# Altium PCB SPI-主板-开关.PcbDoc (part 6 of 11)
Units mm, origin at the board's own origin, x right, y up, seen from the top; angles counter-clockwise.
Board outline 97.69 x 103.45 mm, 2 copper layers (Top Layer, Bottom Layer); 86 components, 63 nets, 260 pads, 250 vias.
Unrouted connection lines stored in the file: 6.
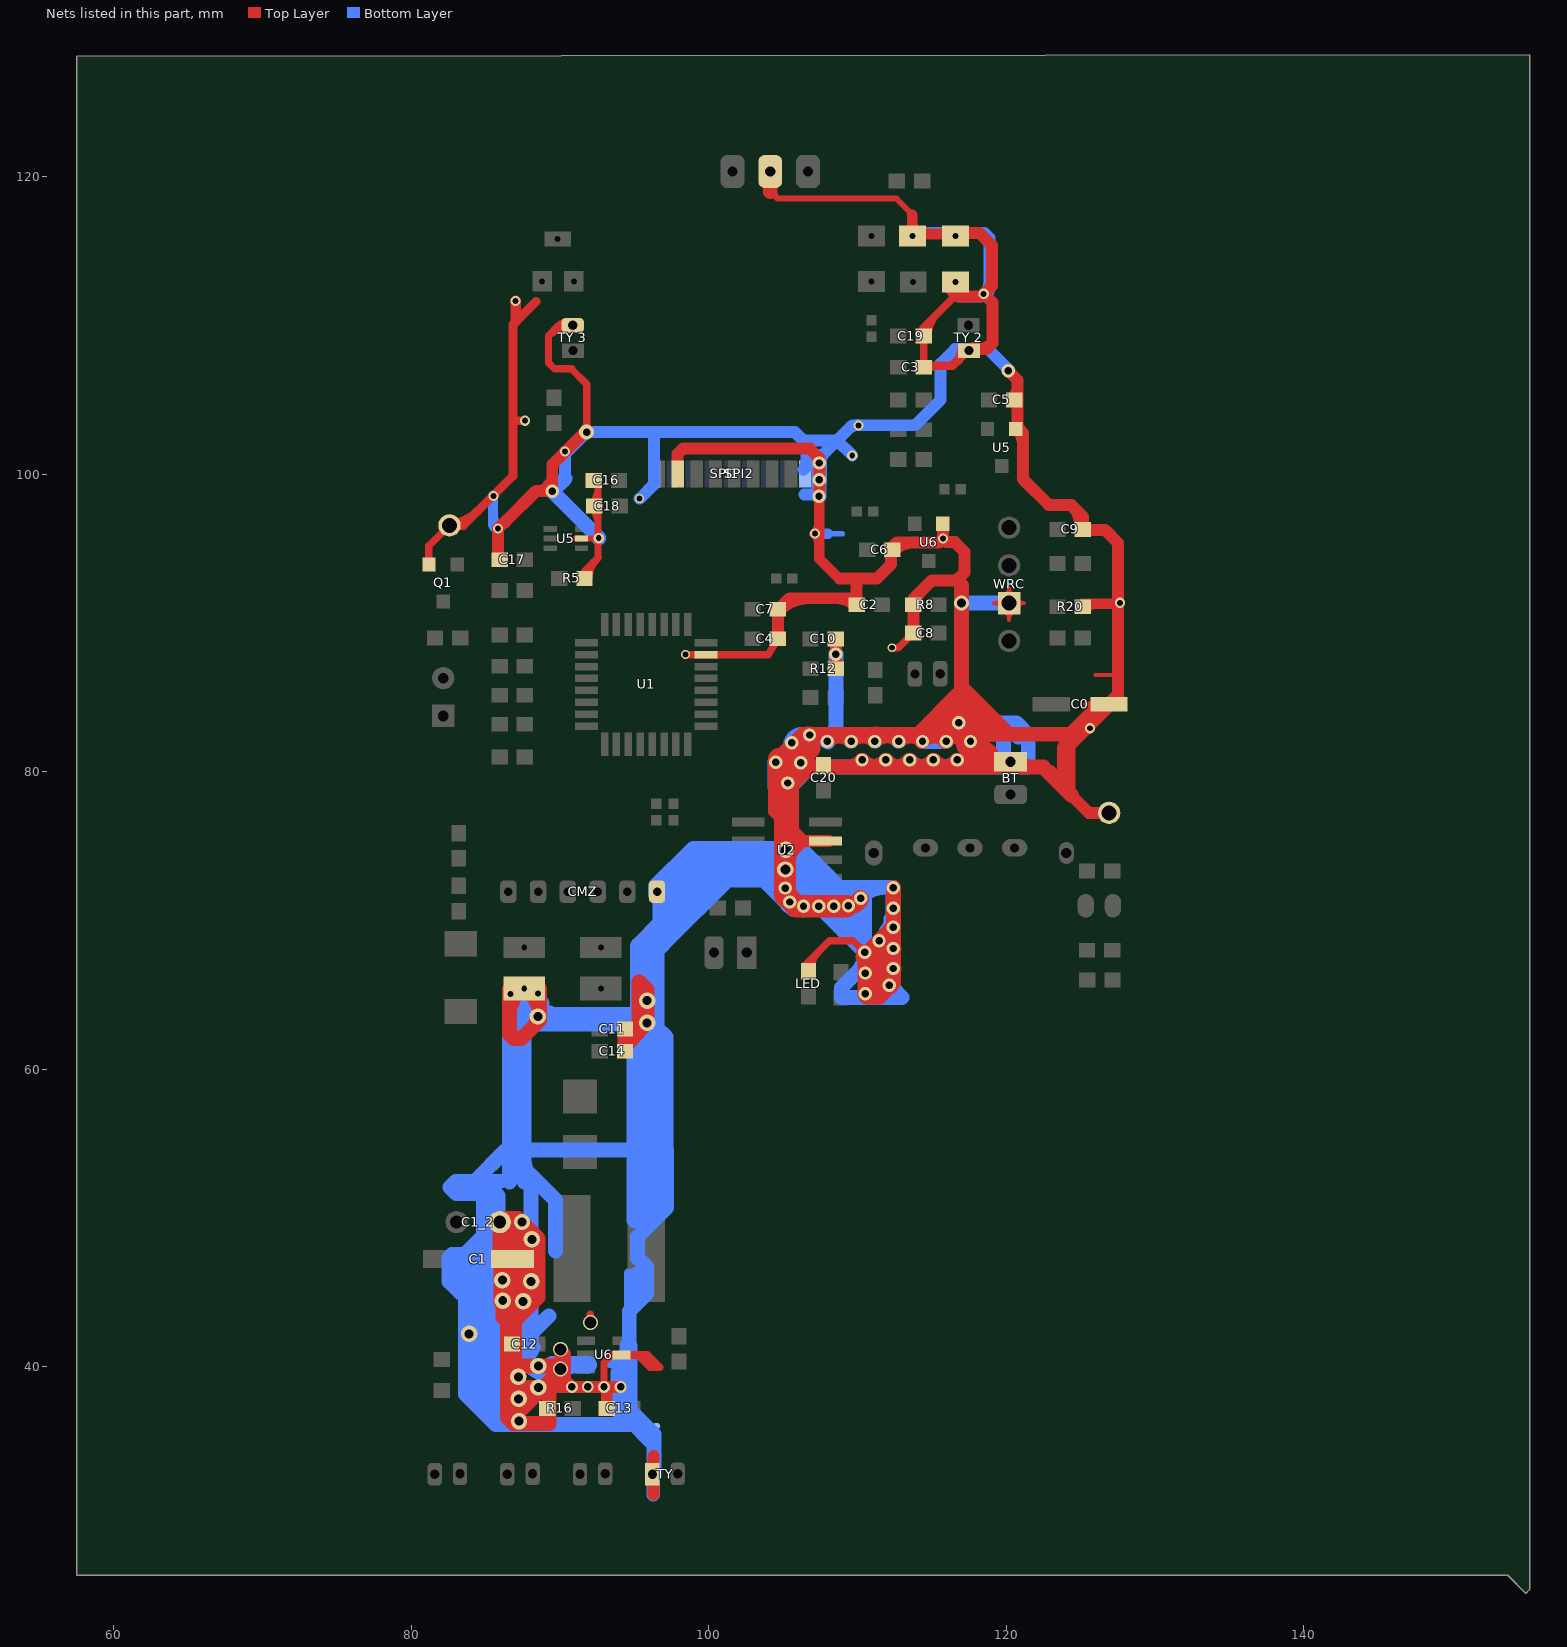
[diagram p6: the nets of this part, all layers, seen from the top]

## Via types
v1: diameter 0.9, hole 0.5, Top Layer to Bottom Layer, 104 vias
v2: diameter 0.68, hole 0.4, Top Layer to Bottom Layer, 100 vias
v3: diameter 1.1, hole 0.6, Top Layer to Bottom Layer, tented both sides, 16 vias
v4: diameter 1, hole 0.8, Top Layer to Bottom Layer, tented both sides, 8 vias
v5: diameter 1, hole 0.6, Top Layer to Bottom Layer, 4 vias
v6: diameter 0.8, hole 0.5, Top Layer to Bottom Layer, 4 vias
v7: diameter 0.7, hole 0.4, Top Layer to Bottom Layer, 4 vias
v8: diameter 0.6, hole 0.4, Top Layer to Bottom Layer, 3 vias
v9: diameter 1.1, hole 0.68, Top Layer to Bottom Layer, 2 vias
v10: diameter 0.8, hole 0.4, Top Layer to Bottom Layer, 2 vias
v11: diameter 1, hole 0.5, Top Layer to Bottom Layer, 1 vias
v12: diameter 0.9, hole 0.6, Top Layer to Bottom Layer, tented bottom, 1 vias
v13: diameter 1.2, hole 0.68, Top Layer to Bottom Layer, 1 vias

## Nets (pads, with @x,y where several pads share a name; then routed paths per layer and width w, separated by ;. In a path a pad name is that pad's centre, name@x,y a point inside that pad or via, vN(x,y) a via of type N, cw(c..) or ccw(c..) an arc to the next point about the centre after c; other vN are vias at no path point) (continued)
GND: (continued)
  Top Layer w0.6: pad.4@82.271,96.52 pad.4@83.16,96.52 ; pad.4@82.575,96.571 83.515,96.571 86.843,99.898 86.843,110.084 87.03,110.271 88.392,111.633 ; 86.893,103.607 v2(87.655,103.607) ; C3.1@114.45,107.3 116.382,107.3 117.501,108.419 ; 116.894,107.887 ccw(c116.562,108.22) 117.009,108.364 ; pad.4@82.194,96.589 ccw(c82.194,99.822) 84.48,97.536 ; pad.4@82.194,96.589 ccw(c82.194,99.822) 84.48,97.536 ; pad.4@82.194,96.589 ccw(c82.194,99.822) 84.48,97.536 ; C3.1@114.641,107.059 cw(c115.224,106.476) 115.224,107.3 ; C3.1@114.641,107.059 cw(c115.224,106.476) 115.224,107.3 ; C3.1@114.641,107.059 cw(c115.224,106.476) 115.224,107.3 ; 116.647,107.566 ccw(c115.794,108.419) 117.001,108.419 ; 116.647,107.566 ccw(c115.794,108.419) 117.001,108.419 ; 116.647,107.566 ccw(c115.794,108.419) 117.001,108.419 ; 116.792,107.639 cw(c117.785,107.373) 117.271,108.263 ; 116.792,107.639 cw(c117.785,107.373) 117.271,108.263 ; 116.792,107.639 cw(c117.785,107.373) 117.271,108.263
  Top Layer w0.7: 87.02,110.28 v2(87.02,111.658) ; v1@107.442,98.476 107.442,94.336 108.788,92.989 ; 108.839,92.939 109.169,92.939 ; pad.0@113.7,116.032 113.7,117.465 ; R20.1@125.15,91.308 v2@127.432,91.308 ; v2@107.144,96.005 ccw(c106.425,96.724) 107.442,96.724 ; v2@107.144,96.005 ccw(c106.425,96.724) 107.442,96.724 ; v2@107.144,96.005 ccw(c106.425,96.724) 107.442,96.724 ; v2@107.144,96.019 cw(c106.425,95.3) 107.442,95.3 ; v2@107.144,96.019 cw(c106.425,95.3) 107.442,95.3 ; v2@107.144,96.019 cw(c106.425,95.3) 107.442,95.3 ; pad.0@113.453,116.279 ccw(c112.855,116.877) 113.7,116.877 ; pad.0@113.453,116.279 ccw(c112.855,116.877) 113.7,116.877 ; pad.0@113.453,116.279 ccw(c112.855,116.877) 113.7,116.877 ; 113.7,116.877 ccw(c114.545,116.877) pad.0@113.947,116.279 ; 113.7,116.877 ccw(c114.545,116.877) pad.0@113.947,116.279 ; 113.7,116.877 ccw(c114.545,116.877) pad.0@113.947,116.279 ; R20.1@125.275,91.23 ccw(c125.495,91.608) 125.714,91.229 ; R20.1@125.275,91.23 ccw(c125.495,91.608) 125.714,91.229 ; R20.1@125.275,91.23 ccw(c125.495,91.608) 125.714,91.229 ; R20.1@125.306,90.994 cw(c126.063,90.237) 126.063,91.308 ; R20.1@125.306,90.994 cw(c126.063,90.237) 126.063,91.308 ; R20.1@125.306,90.994 cw(c126.063,90.237) 126.063,91.308
  Top Layer w0.8: C17.2@85.847,94.356 v2(85.847,96.363) 86.411,96.926 ; 86.411,96.901 88.392,98.882 88.63,98.882 89.484,98.882 89.484,99.736 89.484,100.533 ; pad.0@86.614,65.406 87.617,65.406 87.617,65.431 pad.0@87.617,65.457 ; 87.681,38.608 87.716,38.643 88.91,38.643 v6@90.475,38.643 ; 89.484,100.66 91.669,102.845 v11(91.796,102.845) ; v6@92.95,38.673 v6@92.95,38.643 ; C13.2@93.15,37.2 93.15,38.443 v6@92.95,38.643 ; v6(94.082,38.643) v6(92.964,38.643) v6@92.95,38.643 ; 96.284,31.4 96.284,34.006 ; SPI1.7@97.917,100.032 97.917,101.371 98.273,101.727 106.807,101.727 107.442,101.092 v1(107.442,100.762) v1(107.442,99.644) v1@107.442,98.476 ; C4.2@104.65,89.181 C7.1@104.65,90.932 ; C7.1@104.699,90.932 105.435,91.669 109.513,91.669 C2.1@109.95,91.232 109.95,92.957 109.982,92.989 ; 105.156,76.86 v9@105.156,73.575 ; v9@105.181,72.923 105.181,73.304 v9@105.156,73.33 ; 105.588,76.124 106.35,75.362 ; 106.07,75.362 U2.3@108.077,75.362 ; R12.1@108.55,86.932 v1(108.55,87.909) C10.1@108.55,88.932 ; 108.788,92.989 109.982,92.989 ; pad.0@113.65,115.802 pad.0@113.65,116.032 ; C8.1@113.767,89.813 113.767,91.618 115.011,92.862 116.662,92.862 ; U6.1@115.75,96.682 115.748,96.68 v2(115.748,95.682) ; pad.0@116.6,112.932 116.357,112.344 116.4,112.302 116.756,111.946 118.321,111.946 v2@118.504,112.128 ; pad.0@116.865,116.23 118.199,116.23 119.05,115.38 119.05,112.674 v2@118.504,112.128 ; 117,92.525 116.662,92.862 ; 117.501,108.419 118.681,108.419 119.075,108.814 ; v2(118.491,112.141) v2@118.504,112.128 ; v1(120.142,106.959) 120.766,106.335 120.766,103.134 121.133,102.767 121.133,99.67 122.86,97.942 124.384,97.942 ; 124.409,78.384 125.552,77.241 pad.4@126.924,77.241 ; C0.2@126.924,84.633 127.533,85.242 127.533,95.377 126.644,96.266 125.184,96.266 125.184,97.142 124.384,97.942 ; pad.0@86.629,65.11 cw(c87.343,64.397) pad.0@87.343,65.406 ; pad.0@86.629,65.11 cw(c87.343,64.397) pad.0@87.343,65.406 ; pad.0@86.629,65.11 cw(c87.343,64.397) pad.0@87.343,65.406 ; v6@90.475,38.643 v6(90.805,38.643) ; v6@90.475,38.643 90.043,39.075 v4(90.043,39.853) 90.348,39.853 90.348,40.869 v4(90.043,41.173) 90.043,40.107 90.348,39.802 90.348,39.1 v6(90.805,38.643) ; v6(90.805,38.643) v6@92.95,38.643 ; C7.1@104.771,90.861 cw(c106.72,88.912) 106.72,91.669 ; C7.1@104.771,90.861 cw(c106.72,88.912) 106.72,91.669 ; C7.1@104.771,90.861 cw(c106.72,88.912) 106.72,91.669 ; v9@105.05,73.537 ccw(c104.403,74.185) 105.318,74.185 ; v9@105.05,73.537 ccw(c104.403,74.185) 105.318,74.185 ; v9@105.05,73.537 ccw(c104.403,74.185) 105.318,74.185 ; v9@105.075,74.646 cw(c104.489,74.06) 105.318,74.06 ; v9@105.075,74.646 cw(c104.489,74.06) 105.318,74.06 ; v9@105.075,74.646 cw(c104.489,74.06) 105.318,74.06 ; v9@105.081,73.561 ccw(c104.653,74.303) 105.48,74.082 ; v9@105.081,73.561 ccw(c104.653,74.303) 105.48,74.082 ; v9@105.081,73.561 ccw(c104.653,74.303) 105.48,74.082 ; 105.156,71.704 ccw(c105.578,71.704) v1@105.473,71.295 ; 105.156,71.704 ccw(c105.578,71.704) v1@105.473,71.295 ; 105.156,71.704 ccw(c105.578,71.704) v1@105.473,71.295 ; 105.156,71.704 v1@105.156,71.933 ; v1@105.156,71.933 ccw(c105.946,71.933) v1@105.49,71.288 ; v1@105.156,71.933 ccw(c105.946,71.933) v1@105.49,71.288 ; v1@105.156,71.933 ccw(c105.946,71.933) v1@105.49,71.288 ; v1@105.156,71.933 ccw(c105.946,71.933) v1@105.49,71.288 ; v1@105.156,71.933 ccw(c105.946,71.933) v1@105.49,71.288 ; v1@105.156,71.933 ccw(c105.946,71.933) v1@105.49,71.288 ; v1@105.156,71.933 v9@105.156,73.33 ; v1@105.156,72.104 ccw(c106.317,72.104) v1@105.496,71.282 ; v1@105.156,72.104 ccw(c106.317,72.104) v1@105.496,71.282 ; v1@105.156,72.104 ccw(c106.317,72.104) v1@105.496,71.282 ; v9@105.156,73.33 v9@105.156,73.575 ; v9@105.156,73.33 105.131,73.483 105.115,73.575 105.131,73.575 v9@105.156,73.575 ; v9@105.156,73.575 105.318,73.575 v9@105.318,74.33 ; v9@105.186,74.902 ccw(c105.238,76.473) 106.35,75.362 ; v9@105.186,74.902 ccw(c105.238,76.473) 106.35,75.362 ; v9@105.186,74.902 ccw(c105.238,76.473) 106.35,75.362 ; v9@105.251,74.885 ccw(c105.533,75.42) 106.017,75.056 ; v9@105.251,74.885 ccw(c105.533,75.42) 106.017,75.056 ; v9@105.251,74.885 ccw(c105.533,75.42) 106.017,75.056 ; v9@105.273,73.525 cw(c105.746,73.902) v9@105.318,74.33 ; v9@105.273,73.525 cw(c105.746,73.902) v9@105.318,74.33 ; v9@105.273,73.525 cw(c105.746,73.902) v9@105.318,74.33 ; v9@105.306,73.431 cw(c107.446,73.431) 105.933,74.945 ; v9@105.306,73.431 cw(c107.446,73.431) 105.933,74.945 ; v9@105.306,73.431 cw(c107.446,73.431) 105.933,74.945 ; v9@105.309,74.673 cw(c106.036,74.22) 105.842,75.055 ; v9@105.309,74.673 cw(c106.036,74.22) 105.842,75.055 ; v9@105.309,74.673 cw(c106.036,74.22) 105.842,75.055 ; v9@105.318,74.33 106.35,75.362 ; 107.123,101.411 cw(c106.474,100.762) v1@107.392,100.762 ; 107.123,101.411 cw(c106.474,100.762) v1@107.392,100.762 ; 107.123,101.411 cw(c106.474,100.762) v1@107.392,100.762 ; 108.605,91.669 cw(c108.605,89.937) C2.1@109.829,91.161 ; 108.605,91.669 cw(c108.605,89.937) C2.1@109.829,91.161 ; 108.605,91.669 cw(c108.605,89.937) C2.1@109.829,91.161 ; 109.982,92.989 111.303,92.989 112.268,93.955 112.268,95.047 112.649,95.428 115.494,95.428 v2(115.748,95.682) ; C6.2@112.471,94.861 cw(c113.839,93.493) 113.839,95.428 ; C6.2@112.471,94.861 cw(c113.839,93.493) 113.839,95.428 ; C6.2@112.471,94.861 cw(c113.839,93.493) 113.839,95.428 ; R8.2@113.9,91.232 cw(c115.154,91.232) 114.267,92.119 ; R8.2@113.9,91.232 cw(c115.154,91.232) 114.267,92.119 ; R8.2@113.9,91.232 cw(c115.154,91.232) 114.267,92.119 ; 115.279,95.428 ccw(c115.279,96.15) v2@115.79,95.639 ; 115.279,95.428 ccw(c115.279,96.15) v2@115.79,95.639 ; 115.279,95.428 ccw(c115.279,96.15) v2@115.79,95.639 ; v2@115.705,95.639 ccw(c116.185,96.119) 116.185,95.441 ; v2@115.705,95.639 ccw(c116.185,96.119) 116.185,95.441 ; v2@115.705,95.639 ccw(c116.185,96.119) 116.185,95.441 ; v2(115.748,95.682) 115.989,95.441 116.548,95.441 117.196,94.793 117.196,93.396 116.662,92.862 ; 117.843,108.496 ccw(c118.19,109.699) 119.075,108.814 ; 117.843,108.496 ccw(c118.19,109.699) 119.075,108.814 ; 117.843,108.496 ccw(c118.19,109.699) 119.075,108.814 ; 118.165,111.946 ccw(c118.165,112.467) v2@118.533,112.099 ; 118.165,111.946 ccw(c118.165,112.467) v2@118.533,112.099 ; 118.165,111.946 ccw(c118.165,112.467) v2@118.533,112.099 ; v2@118.504,112.128 119.075,111.557 119.075,108.814 ; C5.1@120.529,105.129 cw(c119.957,104.557) C5.1@120.766,104.557 ; C5.1@120.529,105.129 cw(c119.957,104.557) C5.1@120.766,104.557 ; C5.1@120.529,105.129 cw(c119.957,104.557) C5.1@120.766,104.557 ; C5.1@120.529,105.271 ccw(c119.957,105.843) 120.766,105.843 ; C5.1@120.529,105.271 ccw(c119.957,105.843) 120.766,105.843 ; C5.1@120.529,105.271 ccw(c119.957,105.843) 120.766,105.843 ; U5.1@120.615,103.19 cw(c119.364,101.939) 121.133,101.939 ; U5.1@120.615,103.19 cw(c119.364,101.939) 121.133,101.939 ; U5.1@120.615,103.19 cw(c119.364,101.939) 121.133,101.939 ; U5.1@120.639,103.176 cw(c120.501,102.56) 121.133,102.56 ; U5.1@120.639,103.176 cw(c120.501,102.56) 121.133,102.56 ; U5.1@120.639,103.176 cw(c120.501,102.56) 121.133,102.56 ; 124.384,97.942 cw(c122.885,96.443) C9.1@125,96.307 ; 124.384,97.942 cw(c122.885,96.443) C9.1@125,96.307 ; 124.384,97.942 cw(c122.885,96.443) C9.1@125,96.307 ; 127.533,85.1 ccw(c128.217,85.1) C0.2@127.734,84.617 ; 127.533,85.1 ccw(c128.217,85.1) C0.2@127.734,84.617 ; 127.533,85.1 ccw(c128.217,85.1) C0.2@127.734,84.617 ; 127.533,85.1 ccw(c128.217,85.1) C0.2@127.734,84.617 ; 127.533,85.1 ccw(c128.217,85.1) C0.2@127.734,84.617 ; 127.533,85.1 ccw(c128.217,85.1) C0.2@127.734,84.617
  Top Layer w1: C1_2.1@85.928,49.987 87.198,49.987 v3(87.452,49.733) 88.036,49.149 88.036,49.124 ; C1_2.1@85.95,49.727 C1_2.1@85.95,49.643 ; C1_2.1@86.187,49.647 ccw(c86.8,49.441) 86.339,48.988 ; pad.0@86.614,65.406 86.614,62.332 86.868,62.078 87.427,62.078 88.646,63.297 pad.0@88.646,65.405 ; 87.237,40.056 89.738,40.056 89.738,39.472 88.91,38.643 v3@88.875,38.608 ; pad.0@87.6,65.432 87.617,65.431 87.845,65.427 pad.0@87.72,65.302 ; pad.0@87.612,65.41 87.617,65.406 pad.0@87.72,65.302 ; 87.655,45.364 87.503,45.212 ; 89.306,38.608 89.281,38.608 ; C11.2@94.373,62.611 C14.2@94.373,61.632 ; 104.14,119.024 pad.0@104.14,119.832 ; 105.588,76.124 105.588,79.121 106.782,80.315 ; v1@110.185,71.552 v1@109.601,70.968 ; v1@110.521,66.11 110.896,65.735 110.973,65.811 v1@112.116,65.811 ; v1@110.96,82.245 111.239,82.525 111.252,82.537 ; 111.633,67.869 v1@110.668,67.869 ; 111.735,66.167 111.735,66.192 ; 111.735,66.392 ccw(c113.001,66.392) v1@112.106,65.497 ; v1@111.735,68.758 111.735,66.531 ; v1@112.166,65.761 v1@112.116,65.811 ; v1@112.176,65.497 ccw(c111.587,66.086) 112.42,66.086 ; v1@112.344,66.531 111.735,66.531 ; v1(112.42,72.212) v1(112.42,70.841) v1@112.42,69.621 ; 114.084,82.537 116.789,85.242 117.17,84.861 117.17,84.684 ; 116.027,82.525 116.04,82.537 116.218,82.715 v1(116.815,83.312) ; 117,92.525 v5(117,91.345) 117,85.692 120.167,82.525 124.003,82.525 124.231,82.525 ; v1(117.602,82.042) 118.059,82.499 ; 118.681,82.537 119.875,82.537 ; 124.206,81.839 C0.2@126.913,84.546 ; 124.409,78.41 122.504,80.315 106.782,80.315 ; C1_2.1@85.823,49.512 cw(c85.099,48.281) 86.481,48.639 ; C1_2.1@85.823,49.512 cw(c85.099,48.281) 86.481,48.639 ; C1_2.1@85.823,49.512 cw(c85.099,48.281) 86.481,48.639 ; C1_2.1@85.916,49.48 cw(c85.775,48.465) 86.8,48.465 ; C1_2.1@85.916,49.48 cw(c85.775,48.465) 86.8,48.465 ; C1_2.1@85.916,49.48 cw(c85.775,48.465) 86.8,48.465 ; C1_2.1@85.942,49.477 cw(c85.925,48.939) 86.464,48.939 ; C1_2.1@85.942,49.477 cw(c85.925,48.939) 86.464,48.939 ; C1_2.1@85.942,49.477 cw(c85.925,48.939) 86.464,48.939 ; C1_2.1@85.95,49.11 86.8,48.26 ; C1_2.1@85.95,49.11 85.95,47.359 C1.1@86.04,47.269 ; C1_2.1@85.95,49.11 C1_2.1@85.95,49.643 ; C1_2.1@85.95,49.643 86.8,48.793 ; C1.1@86.04,47.269 86.04,44.313 v3@86.157,44.313 ; C1.1@86.04,47.269 86.538,47.269 86.8,47.007 C1.1@86.8,47.235 86.8,48.26 ; v3@86.103,45.863 ccw(c84.869,47.625) C1.1@87.02,47.625 ; v3@86.103,45.863 ccw(c84.869,47.625) C1.1@87.02,47.625 ; v3@86.103,45.863 ccw(c84.869,47.625) C1.1@87.02,47.625 ; v3@86.112,45.775 cw(c85.545,44.413) v3@87.02,44.413 ; v3@86.112,45.775 cw(c85.545,44.413) v3@87.02,44.413 ; v3@86.112,45.775 cw(c85.545,44.413) v3@87.02,44.413 ; v3@86.121,44.485 ccw(c83.951,46.656) C1.1@87.02,46.656 ; v3@86.121,44.485 ccw(c83.951,46.656) C1.1@87.02,46.656 ; v3@86.121,44.485 ccw(c83.951,46.656) C1.1@87.02,46.656 ; v3@86.157,44.313 v3@86.294,44.313 ; v3@86.157,44.313 v3(86.157,44.45) v3@86.294,44.313 ; v3@86.157,44.313 86.157,43.332 86.462,43.028 86.462,38.52 ; v3@86.157,44.5 ccw(c86.157,46.031) 87.239,44.948 ; v3@86.157,44.5 ccw(c86.157,46.031) 87.239,44.948 ; v3@86.157,44.5 ccw(c86.157,46.031) 87.239,44.948 ; v3@86.169,44.498 ccw(c86.393,45.356) 87.02,44.729 ; v3@86.169,44.498 ccw(c86.393,45.356) 87.02,44.729 ; v3@86.169,44.498 ccw(c86.393,45.356) 87.02,44.729 ; C1_2.1@86.2,49.725 ccw(c88.248,49.708) 86.8,48.26 ; C1_2.1@86.2,49.725 ccw(c88.248,49.708) 86.8,48.26 ; C1_2.1@86.2,49.725 ccw(c88.248,49.708) 86.8,48.26 ; v3@86.294,44.313 86.944,43.663 86.944,38.799 87.136,38.608 ; v3@86.294,44.313 v3@87.237,44.313 ; 86.462,38.52 86.55,38.608 87.136,38.608 ; 86.462,38.52 86.462,36.576 86.652,36.386 ; 86.614,63.776 cw(c88.656,63.776) pad.0@87.212,65.22 ; 86.614,63.776 cw(c88.656,63.776) pad.0@87.212,65.22 ; 86.614,63.776 cw(c88.656,63.776) pad.0@87.212,65.22 ; 86.652,36.386 v3@88.875,38.608 ; 86.652,36.386 86.843,36.195 89.281,36.195 89.281,38.608 ; pad.0@86.682,64.926 ccw(c86.593,65.712) pad.0@87.211,65.219 ; pad.0@86.682,64.926 ccw(c86.593,65.712) pad.0@87.211,65.219 ; pad.0@86.682,64.926 ccw(c86.593,65.712) pad.0@87.211,65.219 ; pad.0@86.682,64.926 ccw(c86.593,65.712) pad.0@87.211,65.219 ; pad.0@86.682,64.926 ccw(c86.593,65.712) pad.0@87.211,65.219 ; pad.0@86.682,64.926 ccw(c86.593,65.712) pad.0@87.211,65.219 ; C1.1@86.713,47.185 cw(c85.431,46.445) 86.861,46.062 ; C1.1@86.713,47.185 cw(c85.431,46.445) 86.861,46.062 ; C1.1@86.713,47.185 cw(c85.431,46.445) 86.861,46.062 ; 86.722,45.525 ccw(c88.445,45.987) v3@87.553,44.443 ; 86.722,45.525 ccw(c88.445,45.987) v3@87.553,44.443 ; 86.722,45.525 ccw(c88.445,45.987) v3@87.553,44.443 ; C1.1@86.729,47.165 cw(c86.026,46.462) 87.02,46.462 ; C1.1@86.729,47.165 cw(c86.026,46.462) 87.02,46.462 ; C1.1@86.729,47.165 cw(c86.026,46.462) 87.02,46.462 ; pad.0@86.748,65.27 cw(c86.085,64.843) 86.767,64.449 ; pad.0@86.748,65.27 cw(c86.085,64.843) 86.767,64.449 ; pad.0@86.748,65.27 cw(c86.085,64.843) 86.767,64.449 ; pad.0@86.796,65.147 cw(c86.186,64.81) 86.856,64.617 ; pad.0@86.796,65.147 cw(c86.186,64.81) 86.856,64.617 ; pad.0@86.796,65.147 cw(c86.186,64.81) 86.856,64.617 ; pad.0@86.796,65.147 cw(c86.186,64.81) 86.856,64.617 ; pad.0@86.796,65.147 cw(c86.186,64.81) 86.856,64.617 ; pad.0@86.796,65.147 cw(c86.186,64.81) 86.856,64.617 ; 86.8,48.26 86.8,48.793 ; 86.8,48.793 ccw(c87.568,49.561) v3@88.089,48.609 ; 86.8,48.793 ccw(c87.568,49.561) v3@88.089,48.609 ; 86.8,48.793 ccw(c87.568,49.561) v3@88.089,48.609 ; 86.8,48.793 87.494,48.099 ; 86.979,48.615 cw(c85.599,47.235) C1.1@87.55,47.235 ; 86.979,48.615 cw(c85.599,47.235) C1.1@87.55,47.235 ; 86.979,48.615 cw(c85.599,47.235) C1.1@87.55,47.235 ; v3@87.02,44.291 cw(c88.486,44.291) v3@88.076,45.697 ; v3@87.02,44.291 cw(c88.486,44.291) v3@88.076,45.697 ; v3@87.02,44.291 cw(c88.486,44.291) v3@88.076,45.697 ; 87.02,44.729 C1.1@87.02,47.625 ; 87.02,44.729 87.237,44.946 ; 87.02,45.746 ccw(c88.876,45.746) v3@87.564,44.435 ; 87.02,45.746 ccw(c88.876,45.746) v3@87.564,44.435 ; 87.02,45.746 ccw(c88.876,45.746) v3@87.564,44.435 ; C1.1@87.02,47.625 ccw(c89.134,47.625) v3@88.087,45.789 ; C1.1@87.02,47.625 ccw(c89.134,47.625) v3@88.087,45.789 ; C1.1@87.02,47.625 ccw(c89.134,47.625) v3@88.087,45.789 ; C1.1@87.02,47.625 87.494,48.099 ; 87.136,38.608 87.681,38.608 v3(88.55,38.608) v3@88.875,38.608 ; v3@87.237,44.313 87.493,44.313 v3@87.503,44.323 ; v3@87.237,44.313 87.237,44.946 ; v3@87.237,44.313 87.237,43.37 88.536,44.668 88.536,48.624 88.036,49.124 ; 87.237,44.946 87.503,45.212 ; 87.494,48.099 cw(c87.047,47.652) C1.1@87.568,47.292 ; 87.494,48.099 cw(c87.047,47.652) C1.1@87.568,47.292 ; 87.494,48.099 cw(c87.047,47.652) C1.1@87.568,47.292 ; 87.494,48.099 cw(c87.047,47.652) C1.1@87.568,47.292 ; 87.494,48.099 cw(c87.047,47.652) C1.1@87.568,47.292 ; 87.494,48.099 cw(c87.047,47.652) C1.1@87.568,47.292 ; 87.494,48.099 87.503,48.108 ; 87.494,48.099 87.503,48.09 ; v3@87.503,44.276 cw(c89.532,44.276) v3@88.097,45.71 ; v3@87.503,44.276 cw(c89.532,44.276) v3@88.097,45.71 ; v3@87.503,44.276 cw(c89.532,44.276) v3@88.097,45.71 ; v3@87.503,44.323 87.68,44.5 v3@87.68,45.364 ; v3@87.503,44.323 87.503,45.212 ; 87.503,44.973 cw(c88.247,44.973) v3@88.073,45.697 ; 87.503,44.973 cw(c88.247,44.973) v3@88.073,45.697 ; 87.503,44.973 cw(c88.247,44.973) v3@88.073,45.697 ; 87.503,44.973 cw(c88.247,44.973) v3@88.073,45.697 ; 87.503,44.973 cw(c88.247,44.973) v3@88.073,45.697 ; 87.503,44.973 cw(c88.247,44.973) v3@88.073,45.697 ; 87.503,45.212 87.503,48.09 ; C1.1@87.503,46.639 cw(c88.246,46.639) C1.1@87.721,47.165 ; C1.1@87.503,46.639 cw(c88.246,46.639) C1.1@87.721,47.165 ; C1.1@87.503,46.639 cw(c88.246,46.639) C1.1@87.721,47.165 ; C1.1@87.503,46.972 cw(c89.705,46.972) v3@88.148,48.529 ; C1.1@87.503,46.972 cw(c89.705,46.972) v3@88.148,48.529 ; C1.1@87.503,46.972 cw(c89.705,46.972) v3@88.148,48.529 ; C1.1@87.503,47.215 ccw(c89.532,47.215) v3@88.097,45.781 ; C1.1@87.503,47.215 ccw(c89.532,47.215) v3@88.097,45.781 ; C1.1@87.503,47.215 ccw(c89.532,47.215) v3@88.097,45.781 ; C1.1@87.503,47.803 cw(c88.223,47.803) v3@88.12,48.515 ; C1.1@87.503,47.803 cw(c88.223,47.803) v3@88.12,48.515 ; C1.1@87.503,47.803 cw(c88.223,47.803) v3@88.12,48.515 ; C1.1@87.503,47.803 cw(c88.223,47.803) v3@88.12,48.515 ; C1.1@87.503,47.803 cw(c88.223,47.803) v3@88.12,48.515 ; C1.1@87.503,47.803 cw(c88.223,47.803) v3@88.12,48.515 ; C1.1@87.503,47.831 ccw(c88.246,47.831) C1.1@87.721,47.306 ; C1.1@87.503,47.831 ccw(c88.246,47.831) C1.1@87.721,47.306 ; C1.1@87.503,47.831 ccw(c88.246,47.831) C1.1@87.721,47.306 ; C1.1@87.503,47.831 ccw(c88.246,47.831) C1.1@87.721,47.306 ; C1.1@87.503,47.831 ccw(c88.246,47.831) C1.1@87.721,47.306 ; C1.1@87.503,47.831 ccw(c88.246,47.831) C1.1@87.721,47.306 ; C1.1@87.503,47.831 ccw(c88.246,47.831) C1.1@87.721,47.306 ; C1.1@87.503,47.831 ccw(c88.246,47.831) C1.1@87.721,47.306 ; C1.1@87.503,47.831 ccw(c88.246,47.831) C1.1@87.721,47.306 ; 87.503,48.09 cw(c87.066,47.653) C1.1@87.569,47.294 ; 87.503,48.09 cw(c87.066,47.653) C1.1@87.569,47.294 ; 87.503,48.09 cw(c87.066,47.653) C1.1@87.569,47.294 ; 87.503,48.09 87.503,48.108 ; 87.503,48.108 v3@87.503,49.327 ; 87.503,48.108 v3@88.036,48.641 ; v3@87.503,49.327 ccw(c88.223,49.327) v3@88.12,48.614 ; v3@87.503,49.327 ccw(c88.223,49.327) v3@88.12,48.614 ; v3@87.503,49.327 ccw(c88.223,49.327) v3@88.12,48.614 ; v3@87.571,44.426 cw(c88.218,44.826) v3@87.68,45.364 ; v3@87.571,44.426 cw(c88.218,44.826) v3@87.68,45.364 ; v3@87.571,44.426 cw(c88.218,44.826) v3@87.68,45.364 ; v3@87.578,44.404 cw(c89.247,44.56) v3(88.062,45.745) ; v3@87.578,44.404 cw(c89.247,44.56) v3(88.062,45.745) ; v3@87.578,44.404 cw(c89.247,44.56) v3(88.062,45.745) ; v3@87.578,44.405 cw(c89.174,44.608) v3@88.036,45.745 ; v3@87.578,44.405 cw(c89.174,44.608) v3@88.036,45.745 ; v3@87.578,44.405 cw(c89.174,44.608) v3@88.036,45.745 ; C1.1@87.579,47.165 cw(c86.414,46) v3@88.062,46 ; C1.1@87.579,47.165 cw(c86.475,46.061) v3@88.036,46.061 ; C1.1@87.579,47.165 cw(c86.414,46) v3@88.062,46 ; C1.1@87.579,47.165 cw(c86.475,46.061) v3@88.036,46.061 ; C1.1@87.579,47.165 cw(c86.414,46) v3@88.062,46 ; C1.1@87.579,47.165 cw(c86.475,46.061) v3@88.036,46.061 ; C1.1@87.579,47.306 ccw(c86.414,48.471) v3@88.062,48.471 ; C1.1@87.579,47.306 ccw(c86.475,48.41) v3@88.036,48.41 ; C1.1@87.579,47.306 ccw(c86.414,48.471) v3@88.062,48.471 ; C1.1@87.579,47.306 ccw(c86.475,48.41) v3@88.036,48.41 ; C1.1@87.579,47.306 ccw(c86.414,48.471) v3@88.062,48.471 ; C1.1@87.579,47.306 ccw(c86.475,48.41) v3@88.036,48.41 ; pad.0@87.617,65.199 cw(c88.125,64.69) pad.0@88.623,65.208 ; pad.0@87.617,65.199 cw(c88.125,64.69) pad.0@88.623,65.208 ; pad.0@87.617,65.199 cw(c88.125,64.69) pad.0@88.623,65.208 ; pad.0@87.617,65.199 pad.0@87.72,65.302 ; 87.662,46.621 cw(c88.381,46.813) C1.1@87.737,47.185 ; 87.662,46.621 cw(c88.381,46.813) C1.1@87.737,47.185 ; 87.662,46.621 cw(c88.381,46.813) C1.1@87.737,47.185 ; v3@87.68,44.703 cw(c89.104,44.703) v3@88.097,45.71 ; v3@87.68,44.703 cw(c89.104,44.703) v3@88.097,45.71 ; v3@87.68,44.703 cw(c89.104,44.703) v3@88.097,45.71 ; v3@87.68,45.364 v3(88.062,45.745) ; pad.0@87.72,65.302 pad.0@87.96,65.062 ; C1.1@87.743,47.271 cw(c88.948,47.73) v3@88.036,48.641 ; C1.1@87.743,47.271 cw(c88.948,47.73) v3@88.036,48.641 ; C1.1@87.743,47.271 cw(c88.948,47.73) v3@88.036,48.641 ; pad.0@87.756,65.266 ccw(c88.519,66.029) pad.0@88.519,64.95 ; pad.0@87.756,65.266 ccw(c88.519,66.029) pad.0@88.519,64.95 ; pad.0@87.756,65.266 ccw(c88.519,66.029) pad.0@88.519,64.95 ; pad.0@87.756,65.266 ccw(c88.519,66.029) pad.0@88.519,64.95 ; pad.0@87.756,65.266 ccw(c88.519,66.029) pad.0@88.519,64.95 ; pad.0@87.756,65.266 ccw(c88.519,66.029) pad.0@88.519,64.95 ; pad.0@87.756,65.266 ccw(c88.519,66.029) pad.0@88.519,64.95 ; pad.0@87.756,65.266 ccw(c88.519,66.029) pad.0@88.519,64.95 ; pad.0@87.756,65.266 ccw(c88.519,66.029) pad.0@88.519,64.95 ; pad.0@87.96,65.062 ccw(c88.339,65.441) pad.0@88.589,64.968 ; pad.0@87.96,65.062 ccw(c88.339,65.441) pad.0@88.589,64.968 ; pad.0@87.96,65.062 ccw(c88.339,65.441) pad.0@88.589,64.968 ; pad.0@87.979,65.231 ccw(c88.579,65.726) pad.0@88.505,64.951 ; pad.0@87.979,65.231 ccw(c88.579,65.726) pad.0@88.505,64.951 ; pad.0@87.979,65.231 ccw(c88.579,65.726) pad.0@88.505,64.951 ; pad.0@87.979,65.231 ccw(c88.579,65.726) pad.0@88.505,64.951 ; pad.0@87.979,65.231 ccw(c88.579,65.726) pad.0@88.505,64.951 ; pad.0@87.979,65.231 ccw(c88.579,65.726) pad.0@88.505,64.951 ; pad.0@87.988,65.22 cw(c86.399,63.631) v3@88.646,63.631 ; pad.0@87.988,65.22 cw(c86.399,63.631) v3@88.646,63.631 ; pad.0@87.988,65.22 cw(c86.399,63.631) v3@88.646,63.631 ; v3@88.036,48.641 88.036,49.124 ; pad.0@88.131,65.421 cw(c88.117,64.714) pad.0@88.627,65.204 ; pad.0@88.131,65.421 cw(c88.117,64.714) pad.0@88.627,65.204 ; pad.0@88.131,65.421 cw(c88.117,64.714) pad.0@88.627,65.204 ; pad.0@88.131,65.421 cw(c88.117,64.714) pad.0@88.627,65.204 ; pad.0@88.131,65.421 cw(c88.117,64.714) pad.0@88.627,65.204 ; pad.0@88.131,65.421 cw(c88.117,64.714) pad.0@88.627,65.204 ; 88.164,62.815 ccw(c87.428,63.551) v3@88.469,63.551 ; 88.164,62.815 ccw(c87.428,63.551) v3@88.469,63.551 ; 88.164,62.815 ccw(c87.428,63.551) v3@88.469,63.551 ; pad.0@88.336,64.647 cw(c88.994,64.847) pad.0@88.387,65.171 ; pad.0@88.336,64.647 cw(c88.994,64.847) pad.0@88.387,65.171 ; pad.0@88.336,64.647 cw(c88.994,64.847) pad.0@88.387,65.171 ; pad.0@88.336,64.647 cw(c88.994,64.847) pad.0@88.387,65.171 ; pad.0@88.336,64.647 cw(c88.994,64.847) pad.0@88.387,65.171 ; pad.0@88.336,64.647 cw(c88.994,64.847) pad.0@88.387,65.171 ; pad.0@88.466,65.293 ccw(c89.327,64.843) 88.486,64.357 ; pad.0@88.466,65.293 ccw(c89.327,64.843) 88.486,64.357 ; pad.0@88.466,65.293 ccw(c89.327,64.843) 88.486,64.357 ; v3@88.875,38.608 89.281,38.608 ; C14.2@94.373,61.632 95.326,62.586 ; C14.2@94.373,61.632 94.373,61.57 95.326,62.523 95.326,62.586 ; 95.326,62.586 v3(95.86,63.119) v3(95.86,64.618) 95.86,65.354 95.326,65.888 95.326,62.586 ; v1@105.308,79.198 ccw(c105.308,80.058) 105.917,79.45 ; v1@105.308,79.198 ccw(c105.308,80.058) 105.917,79.45 ; v1@105.308,79.198 ccw(c105.308,80.058) 105.917,79.45 ; v1@105.321,79.2 ccw(c105.061,80.171) 105.932,79.668 ; v1@105.321,79.2 ccw(c105.061,80.171) 105.932,79.668 ; v1@105.321,79.2 ccw(c105.061,80.171) 105.932,79.668 ; v1@105.321,79.2 ccw(c105.061,80.171) 105.932,79.668 ; v1@105.321,79.2 ccw(c105.061,80.171) 105.932,79.668 ; v1@105.321,79.2 ccw(c105.061,80.171) 105.932,79.668 ; v1@105.344,79.283 cw(c104.755,78.694) 105.588,78.694 ; v1@105.344,79.283 cw(c104.755,78.694) 105.588,78.694 ; v1@105.344,79.283 cw(c104.755,78.694) 105.588,78.694 ; v1@105.654,79.187 ccw(c104.222,80.62) v1@106.247,80.62 ; v1@105.654,79.187 ccw(c104.222,80.62) v1@106.247,80.62 ; v1@105.654,79.187 ccw(c104.222,80.62) v1@106.247,80.62 ; v1@106.161,80.586 ccw(c106.782,81.162) 106.782,80.315 ; v1@106.161,80.586 ccw(c106.782,81.162) 106.782,80.315 ; v1@106.161,80.586 ccw(c106.782,81.162) 106.782,80.315 ; v1@106.162,80.584 ccw(c106.813,81.235) 106.813,80.315 ; v1@106.162,80.584 ccw(c106.813,81.235) 106.813,80.315 ; v1@106.162,80.584 ccw(c106.813,81.235) 106.813,80.315 ; 109.267,80.315 ccw(c109.267,81.842) v1@110.347,80.762 ; 109.267,80.315 ccw(c109.267,81.842) v1@110.347,80.762 ; 109.267,80.315 ccw(c109.267,81.842) v1@110.347,80.762 ; v1@109.271,70.968 ccw(c109.271,72.223) v1@110.276,71.471 ; v1@109.271,70.968 ccw(c109.271,72.223) v1@110.276,71.471 ; v1@109.271,70.968 ccw(c109.271,72.223) v1@110.276,71.471 ; v1@109.271,70.968 v1@109.601,70.968 ; v1@109.601,70.968 ccw(c109.601,71.676) v1@110.284,71.488 ; v1@109.601,70.968 ccw(c109.601,71.676) v1@110.284,71.488 ; v1@109.601,70.968 ccw(c109.601,71.676) v1@110.284,71.488 ; v1@110.276,80.762 ccw(c111.356,81.842) 111.356,80.315 ; v1@110.276,80.762 ccw(c111.356,81.842) 111.356,80.315 ; v1@110.276,80.762 ccw(c111.356,81.842) 111.356,80.315 ; v1@110.356,67.541 cw(c109.928,66.992) v1@110.49,66.581 ; v1@110.356,67.541 cw(c109.928,66.992) v1@110.49,66.581 ; v1@110.356,67.541 cw(c109.928,66.992) v1@110.49,66.581 ; v1@110.44,67.869 ccw(c111.362,67.869) 110.71,67.217 ; v1@110.44,67.869 ccw(c111.362,67.869) 110.71,67.217 ; v1@110.44,67.869 ccw(c111.362,67.869) 110.71,67.217 ; v1@110.442,67.856 ccw(c111.558,68.155) 110.98,67.154 ; v1@110.442,67.856 ccw(c111.558,68.155) 110.98,67.154 ; v1@110.442,67.856 ccw(c111.558,68.155) 110.98,67.154 ; v1@110.442,67.856 ccw(c111.558,68.155) 110.98,67.154 ; v1@110.442,67.856 ccw(c111.558,68.155) 110.98,67.154 ; v1@110.442,67.856 ccw(c111.558,68.155) 110.98,67.154 ; v1@110.443,67.887 ccw(c110.987,67.674) 110.521,67.323 ; v1@110.443,67.887 ccw(c110.987,67.674) 110.521,67.323 ; v1@110.443,67.887 ccw(c110.987,67.674) 110.521,67.323 ; v1@110.443,67.887 ccw(c110.987,67.674) 110.521,67.323 ; v1@110.49,66.481 cw(c110.49,64.173) v1@112.122,65.805 ; v1@110.49,66.481 cw(c110.49,64.173) v1@112.122,65.805 ; v1@110.49,66.481 cw(c110.49,64.173) v1@112.122,65.805 ; v1@110.49,66.531 111.396,66.531 ; v1@110.49,66.531 v1@110.49,67.437 ; v1@110.49,66.531 110.49,64.999 110.642,64.846 111.455,64.846 v1@112.42,65.811 ; v1@110.49,66.581 cw(c111.122,66.333) 111.276,66.994 ; v1@110.49,66.581 cw(c111.122,66.333) 111.276,66.994 ; v1@110.49,66.581 cw(c111.122,66.333) 111.276,66.994 ; v1@110.49,67.437 ccw(c112.224,69.171) v1@112.424,66.727 ; v1@110.49,67.437 ccw(c112.224,69.171) v1@112.424,66.727 ; v1@110.49,67.437 ccw(c112.224,69.171) v1@112.424,66.727 ; v1@110.49,67.437 111.396,66.531 ; v1@110.49,67.437 v1(110.49,67.869) ; v1(110.49,67.869) ccw(c110.49,68.929) v1@111.503,68.616 ; v1(110.49,67.869) ccw(c110.49,68.929) v1@111.503,68.616 ; v1(110.49,67.869) ccw(c110.49,68.929) v1@111.503,68.616 ; v1(110.49,67.869) v1@110.668,67.869 ; v1@110.668,67.869 v1@112.42,69.621 ; 110.867,80.315 ccw(c110.867,81.842) v1@111.947,80.762 ; 110.867,80.315 ccw(c110.867,81.842) v1@111.947,80.762 ; 110.867,80.315 ccw(c110.867,81.842) v1@111.947,80.762 ; 111.396,66.531 111.735,66.531 ; 111.396,66.531 111.735,66.192 ; v1@111.491,68.666 cw(c110.901,68.077) 111.735,68.077 ; v1@111.491,68.666 cw(c110.901,68.077) 111.735,68.077 ; v1@111.491,68.666 cw(c110.901,68.077) 111.735,68.077 ; 111.735,66.192 v1@112.116,65.811 ; 111.735,66.192 111.735,66.531 ; 111.735,66.588 cw(c113.955,66.588) v1@112.385,68.158 ; 111.735,66.588 cw(c113.955,66.588) v1@112.385,68.158 ; 111.735,66.588 cw(c113.955,66.588) v1@112.385,68.158 ; v1@111.735,68.312 ccw(c113.955,68.312) v1@112.385,66.741 ; v1@111.735,68.312 ccw(c113.955,68.312) v1@112.385,66.741 ; v1@111.735,68.312 ccw(c113.955,68.312) v1@112.385,66.741 ; v1@111.876,80.762 ccw(c112.956,81.842) 112.956,80.315 ; v1@111.876,80.762 ccw(c112.956,81.842) 112.956,80.315 ; v1@111.876,80.762 ccw(c112.956,81.842) 112.956,80.315 ; 111.928,67.869 ccw(c111.928,68.615) v1@112.456,68.087 ; 111.928,67.869 ccw(c111.928,68.615) v1@112.456,68.087 ; 111.928,67.869 ccw(c111.928,68.615) v1@112.456,68.087 ; 111.928,67.869 ccw(c111.928,68.615) v1@112.456,68.087 ; 111.928,67.869 ccw(c111.928,68.615) v1@112.456,68.087 ; 111.928,67.869 ccw(c111.928,68.615) v1@112.456,68.087 ; 111.948,66.531 ccw(c111.948,67.249) v1@112.456,66.741 ; 111.948,66.531 ccw(c111.948,67.249) v1@112.456,66.741 ; 111.948,66.531 ccw(c111.948,67.249) v1@112.456,66.741 ; v1@112.116,65.811 v1@112.42,65.811 ; v1@112.42,65.811 v1(112.42,66.777) v1(112.42,68.123) v1(112.42,69.545) v1@112.42,69.621 ; 112.467,80.315 ccw(c112.467,81.842) v1@113.547,80.762 ; 112.467,80.315 ccw(c112.467,81.842) v1@113.547,80.762 ; 112.467,80.315 ccw(c112.467,81.842) v1@113.547,80.762 ; v1@113.476,80.762 ccw(c114.556,81.842) 114.556,80.315 ; v1@113.476,80.762 ccw(c114.556,81.842) 114.556,80.315 ; v1@113.476,80.762 ccw(c114.556,81.842) 114.556,80.315 ; 114.067,80.315 ccw(c114.067,81.842) v1@115.147,80.762 ; 114.067,80.315 ccw(c114.067,81.842) v1@115.147,80.762 ; 114.067,80.315 ccw(c114.067,81.842) v1@115.147,80.762 ; v1@114.325,82.042 cw(c116.103,82.042) 114.846,83.299 ; v1@114.325,82.042 cw(c116.103,82.042) 114.846,83.299 ; v1@114.325,82.042 cw(c116.103,82.042) 114.846,83.299 ; v1@115.076,80.762 ccw(c116.156,81.842) 116.156,80.315 ; v1@115.076,80.762 ccw(c116.156,81.842) 116.156,80.315 ; v1@115.076,80.762 ccw(c116.156,81.842) 116.156,80.315 ; 115.265,82.779 cw(c116.684,81.36) v1@116.818,83.362 ; 115.265,82.779 cw(c116.684,81.36) v1@116.818,83.362 ; 115.265,82.779 cw(c116.684,81.36) v1@116.818,83.362 ; 115.265,82.779 117.17,84.684 ; 115.667,80.315 ccw(c115.667,81.842) v1@116.747,80.762 ; 115.667,80.315 ccw(c115.667,81.842) v1@116.747,80.762 ; 115.667,80.315 ccw(c115.667,81.842) v1@116.747,80.762 ; v1@115.925,82.042 cw(c116.844,82.042) 116.194,82.692 ; v1@115.925,82.042 cw(c116.844,82.042) 116.194,82.692 ; v1@115.925,82.042 cw(c116.844,82.042) 116.194,82.692 ; v1@115.925,82.042 cw(c116.844,82.042) 116.194,82.692 ; v1@115.925,82.042 cw(c116.844,82.042) 116.194,82.692 ; v1@115.925,82.042 cw(c116.844,82.042) 116.194,82.692 ; v1@115.925,82.042 cw(c116.844,82.042) 116.194,82.692 ; v1@115.925,82.042 cw(c116.844,82.042) 116.194,82.692 ; v1@115.925,82.042 cw(c116.844,82.042) 116.194,82.692 ; v1@116.676,80.762 ccw(c117.756,81.842) 117.756,80.315 ; v1@116.676,80.762 ccw(c117.756,81.842) 117.756,80.315 ; v1@116.676,80.762 ccw(c117.756,81.842) 117.756,80.315 ; v1@116.766,83.301 cw(c118.231,83.623) 117.17,84.684 ; v1@116.766,83.301 cw(c118.231,83.623) 117.17,84.684 ; v1@116.766,83.301 cw(c118.231,83.623) 117.17,84.684 ; v1@116.779,83.277 ccw(c117.859,84.356) 117.859,82.829 ; v1@116.779,83.277 ccw(c117.859,84.356) 117.859,82.829 ; v1@116.779,83.277 ccw(c117.859,84.356) 117.859,82.829 ; v1@116.836,83.267 ccw(c116.586,83.795) 117.17,83.795 ; v1@116.836,83.267 ccw(c116.586,83.795) 117.17,83.795 ; v1@116.836,83.267 ccw(c116.586,83.795) 117.17,83.795 ; v1@116.836,83.267 ccw(c116.586,83.795) 117.17,83.795 ; v1@116.836,83.267 ccw(c116.586,83.795) 117.17,83.795 ; v1@116.836,83.267 ccw(c116.586,83.795) 117.17,83.795 ; v1@116.84,83.355 cw(c116.467,82.711) 117.186,82.903 ; v1@116.84,83.355 cw(c116.467,82.711) 117.186,82.903 ; v1@116.84,83.355 cw(c116.467,82.711) 117.186,82.903 ; v1@116.84,83.355 cw(c116.467,82.711) 117.186,82.903 ; v1@116.84,83.355 cw(c116.467,82.711) 117.186,82.903 ; v1@116.84,83.355 cw(c116.467,82.711) 117.186,82.903 ; v1@116.844,83.352 cw(c116.379,82.713) 117.17,82.713 ; v1@116.844,83.352 cw(c116.379,82.713) 117.17,82.713 ; v1@116.844,83.352 cw(c116.379,82.713) 117.17,82.713 ; v1@116.85,83.277 ccw(c116.077,84.05) 117.17,84.05 ; v1@116.85,83.277 ccw(c116.077,84.05) 117.17,84.05 ; v1@116.85,83.277 ccw(c116.077,84.05) 117.17,84.05 ; 117.17,82.829 ccw(c118.223,82.829) v1@117.571,82.003 ; 117.17,82.829 ccw(c118.223,82.829) v1@117.571,82.003 ; 117.17,82.829 ccw(c118.223,82.829) v1@117.571,82.003 ; 117.17,82.829 117.17,83.795 ; 117.17,82.829 118.643,82.829 ; 117.17,82.964 ccw(c118.524,82.964) v1@117.567,82.007 ; 117.17,82.964 ccw(c118.524,82.964) v1@117.567,82.007 ; 117.17,82.964 ccw(c118.524,82.964) v1@117.567,82.007 ; 117.17,83.795 117.78,84.404 117.78,83.337 118.529,83.337 118.643,83.223 118.643,82.829 ; 117.17,83.795 117.17,84.684 ; v1@117.555,82.059 cw(c118.643,81.675) 118.643,82.829 ; v1@117.555,82.059 cw(c118.643,81.675) 118.643,82.829 ; v1@117.555,82.059 cw(c118.643,81.675) 118.643,82.829 ; 118.86,80.315 ccw(c118.86,81.561) BT.2@119.741,80.68 ; 118.86,80.315 ccw(c118.86,81.561) BT.2@119.741,80.68 ; 118.86,80.315 ccw(c118.86,81.561) BT.2@119.741,80.68 ; BT.2@120.853,80.68 ccw(c121.734,81.561) 121.734,80.315 ; BT.2@120.853,80.68 ccw(c121.734,81.561) 121.734,80.315 ; BT.2@120.853,80.68 ccw(c121.734,81.561) 121.734,80.315 ; v2@125.633,83.265 ccw(c124.352,84.546) C0.2@126.163,84.546 ; v2@125.633,83.265 ccw(c124.352,84.546) C0.2@126.163,84.546 ; v2@125.633,83.265 ccw(c124.352,84.546) C0.2@126.163,84.546 ; v1@111.885,65.942 cw(c111.557,65.376) 112.189,65.545 ccw(c111.557,65.376) v1@111.885,65.942
  Top Layer w1.2: 124.003,79.985 124.003,81.61
  Top Layer w1.5: 105.156,71.704 105.893,70.968 v1@109.271,70.968 ; v1@105.156,71.933 105.131,71.958 105.131,73.483 105.131,73.575 105.131,79.959 106.782,81.61 ; 118.75,81.153 118.407,81.407 ; v1@104.733,80.857 cw(c103.774,79.898) 105.131,79.898 ; v1@104.733,80.857 cw(c103.774,79.898) 105.131,79.898 ; v1@104.733,80.857 cw(c103.774,79.898) 105.131,79.898 ; v1@104.733,80.857 cw(c103.774,79.898) 105.131,79.898 ; v1@104.733,80.857 cw(c103.774,79.898) 105.131,79.898 ; v1@104.733,80.857 cw(c103.774,79.898) 105.131,79.898 ; v1@105.008,79.248 cw(c106.43,79.248) 105.425,80.253 ; v1@105.008,79.248 cw(c106.43,79.248) 105.425,80.253 ; v1@105.008,79.248 cw(c106.43,79.248) 105.425,80.253 ; v1@117.365,81.858 ccw(c118.285,82.571) 118.285,81.407 ; v1@117.365,81.858 ccw(c118.285,82.571) 118.285,81.407 ; v1@117.365,81.858 ccw(c118.285,82.571) 118.285,81.407 ; v1@117.389,81.831 ccw(c118.407,82.842) 118.407,81.407 ; v1@117.389,81.831 ccw(c118.407,82.842) 118.407,81.407 ; v1@117.389,81.831 ccw(c118.407,82.842) 118.407,81.407 ; 118.285,81.407 118.407,81.407
  Bottom Layer w0.35: v2(107.137,96.012) 108.991,96.012 ; v2@107.254,95.895 cw(c107.536,95.614) 107.536,96.012 ; v2@107.254,95.895 cw(c107.536,95.614) 107.536,96.012 ; v2@107.254,95.895 cw(c107.536,95.614) 107.536,96.012 ; v2@107.254,96.129 ccw(c107.536,96.41) 107.536,96.012 ; v2@107.254,96.129 ccw(c107.536,96.41) 107.536,96.012 ; v2@107.254,96.129 ccw(c107.536,96.41) 107.536,96.012
  Bottom Layer w0.4: SPI2.8@106.375,100.223 106.375,102.273 ; 106.375,101.327 ccw(c107.31,101.327) SPI2.8@106.649,100.666 ; 106.375,101.327 ccw(c107.31,101.327) SPI2.8@106.649,100.666 ; 106.375,101.327 ccw(c107.31,101.327) SPI2.8@106.649,100.666
  Bottom Layer w0.6: 94.615,41.395 94.615,46.304
  Bottom Layer w0.7: v2(85.522,98.552) 85.52,98.554 85.496,98.53 85.496,96.714 ; v2(85.847,96.363) 85.496,96.714 ; v2(107.137,96.012) 108.009,96.012 ; 85.496,96.714 ccw(c85.857,96.714) v2@85.847,96.353 ; 85.496,96.714 ccw(c85.857,96.714) v2@85.847,96.353 ; 85.496,96.714 ccw(c85.857,96.714) v2@85.847,96.353 ; 85.496,97.186 ccw(c86.67,97.186) v2@85.84,96.356 ; 85.496,97.186 ccw(c86.67,97.186) v2@85.84,96.356 ; 85.496,97.186 ccw(c86.67,97.186) v2@85.84,96.356
  Bottom Layer w0.8: 86.614,63.833 86.711,63.833 ; pad.0@88.519,65.19 ccw(c88.916,64.889) 88.568,64.532 ; 89.484,63.5 89.84,63.144 ; 90.348,99.72 v2(90.348,101.524) ; 90.38,62.944 87.6,62.944 ; v2@90.411,101.46 v11(91.796,102.845) 96.33,102.845 ; 95.152,63.805 89.227,63.805 ; v8(95.352,98.374) 96.33,99.353 pad.0@96.33,100.032 96.33,102.845 ; 95.555,63.805 96.418,63.805 ; 95.656,66.345 95.656,66.712 ; 106.426,98.645 v1@107.298,98.645 ; v1@107.417,99.593 v1@107.417,100.533 ; v1@107.442,101.092 108.623,102.273 ; v1@108.153,71.145 108.179,71.12 v1@108.382,70.917 ; v2(109.652,101.27) 108.648,102.273 108.623,102.273 ; pad.0@113.64,116.053 113.817,116.23 118.542,116.23 118.872,115.9 118.872,112.497 ; pad.0@116.6,112.932 116.6,112.127 116.789,111.938 118.313,111.938 v2@118.504,112.128 ; v2(118.491,112.141) v2@118.504,112.128 ; 118.859,108.419 118.784,108.419 ; v1(120.142,106.959) 120.244,106.959 118.784,108.419 ; 86.711,63.833 87.6,62.944 ; 86.711,63.833 87.6,63.833 ; pad.0@87.317,65.149 cw(c86.634,64.466) 87.6,64.466 ; pad.0@87.317,65.149 cw(c86.634,64.466) 87.6,64.466 ; pad.0@87.317,65.149 cw(c86.634,64.466) 87.6,64.466 ; 87.6,62.944 ccw(c87.6,63.73) v3@88.372,63.579 ; 87.6,62.944 ccw(c87.6,63.73) v3@88.372,63.579 ; 87.6,62.944 ccw(c87.6,63.73) v3@88.372,63.579 ; 87.6,63.833 87.602,63.833 ; 87.6,63.833 pad.0@87.6,65.432 ; 87.6,64.466 cw(c88.566,64.466) pad.0@87.883,65.149 ; 87.6,64.466 cw(c88.566,64.466) pad.0@87.883,65.149 ; 87.6,64.466 cw(c88.566,64.466) pad.0@87.883,65.149 ; pad.0@87.6,65.432 cw(c85.743,63.575) v3@88.369,63.552 ; pad.0@87.6,65.432 cw(c85.743,63.575) v3@88.369,63.552 ; pad.0@87.6,65.432 cw(c85.743,63.575) v3@88.369,63.552 ; pad.0@87.6,65.432 89.227,63.805 ; 87.602,63.833 ccw(c88.131,64.362) v3@88.454,63.686 ; 87.602,63.833 ccw(c88.131,64.362) v3@88.454,63.686 ; 87.602,63.833 ccw(c88.131,64.362) v3@88.454,63.686 ; 87.602,63.833 87.617,63.817 ; pad.0@87.602,65.43 ccw(c88.519,66.348) pad.0@88.519,65.05 ; pad.0@87.602,65.43 ccw(c88.519,66.348) pad.0@88.519,65.05 ; pad.0@87.602,65.43 ccw(c88.519,66.348) pad.0@88.519,65.05 ; 87.617,63.817 ccw(c88.125,64.325) v3@88.451,63.684 ; 87.617,63.817 ccw(c88.125,64.325) v3@88.451,63.684 ; 87.617,63.817 ccw(c88.125,64.325) v3@88.451,63.684 ; pad.0@88.004,65.083 cw(c87.267,63.771) 88.721,64.16 ; pad.0@88.004,65.083 cw(c87.267,63.771) 88.721,64.16 ; pad.0@88.004,65.083 cw(c87.267,63.771) 88.721,64.16 ; 88.059,63.091 ccw(c88.416,63.447) 88.416,62.944 ; 88.059,63.091 ccw(c88.416,63.447) 88.416,62.944 ; 88.059,63.091 ccw(c88.416,63.447) 88.416,62.944 ; 88.2,64.204 ccw(c89.03,64.418) v3@88.595,63.68 ; 88.2,64.204 ccw(c89.03,64.418) v3@88.595,63.68 ; 88.2,64.204 ccw(c89.03,64.418) v3@88.595,63.68 ; v3@88.464,63.69 ccw(c88.21,64.333) 88.87,64.537 ; v3@88.464,63.69 ccw(c88.21,64.333) 88.87,64.537 ; v3@88.464,63.69 ccw(c88.21,64.333) 88.87,64.537 ; v3@88.464,63.69 ccw(c88.21,64.333) 88.87,64.537 ; v3@88.464,63.69 ccw(c88.21,64.333) 88.87,64.537 ; v3@88.464,63.69 ccw(c88.21,64.333) 88.87,64.537 ; pad.0@88.469,65.1 ccw(c89.766,65.1) 88.849,64.183 ; pad.0@88.469,65.1 ccw(c89.766,65.1) 88.849,64.183 ; pad.0@88.469,65.1 ccw(c89.766,65.1) 88.849,64.183 ; pad.0@88.47,65.112 ccw(c89.381,64.884) 88.576,64.402 ; pad.0@88.47,65.112 ccw(c89.381,64.884) 88.576,64.402 ; pad.0@88.47,65.112 ccw(c89.381,64.884) 88.576,64.402 ; pad.0@88.47,65.112 ccw(c89.381,64.884) 88.576,64.402 ; v3@88.558,63.406 cw(c88.78,62.578) 89.208,63.32 ; v3@88.558,63.406 cw(c88.78,62.578) 89.208,63.32 ; v3@88.558,63.406 cw(c88.78,62.578) 89.208,63.32 ; v3@88.578,63.689 ccw(c88.808,64.233) 89.104,63.721 ; v3@88.578,63.689 ccw(c88.808,64.233) 89.104,63.721 ; v3@88.578,63.689 ccw(c88.808,64.233) 89.104,63.721 ; pad.0@88.6,65.415 ccw(c90.746,65.324) 89.227,63.805 ; pad.0@88.6,65.415 ccw(c90.746,65.324) 89.227,63.805 ; pad.0@88.6,65.415 ccw(c90.746,65.324) 89.227,63.805 ; v3@88.625,63.445 cw(c89.494,62.575) 89.494,63.805 ; v3@88.625,63.445 cw(c89.494,62.575) 89.494,63.805 ; v3@88.625,63.445 cw(c89.494,62.575) 89.494,63.805 ; v3@88.625,63.657 ccw(c90.347,65.379) 90.347,62.944 ; v3@88.625,63.657 ccw(c90.347,65.379) 90.347,62.944 ; v3@88.625,63.657 ccw(c90.347,65.379) 90.347,62.944 ; v3@88.648,63.474 cw(c89.227,63.132) 89.227,63.805 ; v3@88.648,63.474 cw(c89.227,63.132) 89.227,63.805 ; v3@88.648,63.474 cw(c89.227,63.132) 89.227,63.805 ; 88.949,64.083 cw(c88.418,63.552) 89.169,63.545 ; 88.949,64.083 cw(c88.418,63.552) 89.169,63.545 ; 88.949,64.083 cw(c88.418,63.552) 89.169,63.545 ; 96.33,102.845 105.804,102.845 106.375,102.273 ; 106.375,102.273 108.623,102.273 ; 106.375,102.273 106.832,101.816 ; SPI2.8@106.38,100.307 cw(c107.202,99.743) v1@107.431,100.713 ; SPI2.8@106.38,100.307 cw(c107.202,99.743) v1@107.431,100.713 ; SPI2.8@106.38,100.307 cw(c107.202,99.743) v1@107.431,100.713 ; SPI2.8@106.38,100.307 cw(c107.202,99.743) v1@107.431,100.713 ; SPI2.8@106.38,100.307 cw(c107.202,99.743) v1@107.431,100.713 ; SPI2.8@106.38,100.307 cw(c107.202,99.743) v1@107.431,100.713 ; SPI2.8@106.472,100.524 ccw(c105.603,101.394) 106.832,101.394 ; SPI2.8@106.472,100.524 ccw(c105.603,101.394) 106.832,101.394 ; SPI2.8@106.472,100.524 ccw(c105.603,101.394) 106.832,101.394 ; SPI2.8@106.473,100.526 ccw(c105.772,101.321) 106.832,101.321 ; SPI2.8@106.473,100.526 ccw(c105.772,101.321) 106.832,101.321 ; SPI2.8@106.473,100.526 ccw(c105.772,101.321) 106.832,101.321 ; SPI2.8@106.515,100.504 cw(c107.442,100.386) 107.442,101.321 ; SPI2.8@106.515,100.504 cw(c107.442,100.386) 107.442,101.321 ; SPI2.8@106.515,100.504 cw(c107.442,100.386) 107.442,101.321 ; 106.832,101.321 cw(c106.832,100.761) v1@107.392,100.762 ; 106.832,101.321 cw(c106.832,100.761) v1@107.392,100.762 ; 106.832,101.321 cw(c106.832,100.761) v1@107.392,100.762 ; 106.832,101.321 107.442,101.321 ; 106.832,101.321 106.832,101.816 ; 106.832,101.816 ccw(c107.954,101.816) v1@107.464,100.807 ; 106.832,101.816 ccw(c107.954,101.816) v1@107.464,100.807 ; 106.832,101.816 ccw(c107.954,101.816) v1@107.464,100.807 ; v1@107.425,70.931 cw(c107.896,70.431) v1@108.382,70.917 ; v1@107.425,70.931 cw(c107.896,70.431) v1@108.382,70.917 ; v1@107.425,70.931 cw(c107.896,70.431) v1@108.382,70.917 ; v1@107.492,100.762 cw(c108.41,100.762) 107.761,101.411 ; v1@107.492,100.762 cw(c108.41,100.762) 107.761,101.411 ; v1@107.492,100.762 cw(c108.41,100.762) 107.761,101.411 ; 108.623,102.273 109.652,103.302 113.881,103.302 115.595,105.016 115.595,107.442 116.573,108.419 117.501,108.419 118.784,108.419 ; 109.406,103.056 cw(c110.084,102.377) v2@110.084,103.336 ; 109.406,103.056 cw(c110.084,102.377) v2@110.084,103.336 ; 109.406,103.056 cw(c110.084,102.377) v2@110.084,103.336 ; 116.006,107.853 cw(c117.181,106.678) 117.181,108.339 ; 116.006,107.853 cw(c117.181,106.678) 117.181,108.339 ; 116.006,107.853 cw(c117.181,106.678) 117.181,108.339 ; pad.0@116.388,112.72 cw(c115.876,112.208) 116.6,112.208 ; pad.0@116.388,112.72 cw(c115.876,112.208) 116.6,112.208 ; pad.0@116.388,112.72 cw(c115.876,112.208) 116.6,112.208 ; 116.6,112.208 cw(c117.324,112.208) pad.0@116.812,112.72 ; 116.6,112.208 cw(c117.324,112.208) pad.0@116.812,112.72 ; 116.6,112.208 cw(c117.324,112.208) pad.0@116.812,112.72 ; 118.145,111.938 ccw(c118.145,112.487) v2@118.533,112.099 ; 118.145,111.938 ccw(c118.145,112.487) v2@118.533,112.099 ; 118.145,111.938 ccw(c118.145,112.487) v2@118.533,112.099 ; v2@118.497,112.081 ccw(c118.455,112.497) 118.872,112.497 ; v2@118.497,112.081 ccw(c118.455,112.497) 118.872,112.497 ; v2@118.497,112.081 ccw(c118.455,112.497) 118.872,112.497 ; v2@118.504,112.128 118.872,112.497 ; v2@118.533,112.099 ccw(c117.716,112.916) 118.872,112.916 ; v2@118.533,112.099 ccw(c117.716,112.916) 118.872,112.916 ; v2@118.533,112.099 ccw(c117.716,112.916) 118.872,112.916
  Bottom Layer w0.9: 83.642,43.06 84.099,42.603 84.404,42.298 84.7,42.002 84.712,41.99 85.014,41.688 85.271,41.431 85.656,41.046 87.046,39.656 87.046,36.779 86.652,36.386 ; 93.484,40.322 93.841,40.322 ; 93.841,39.599 93.841,37.009 94.742,36.108 ; 96.284,31.4 96.284,34.006